# EAGLE board half bridge (EAGLE 5.08)
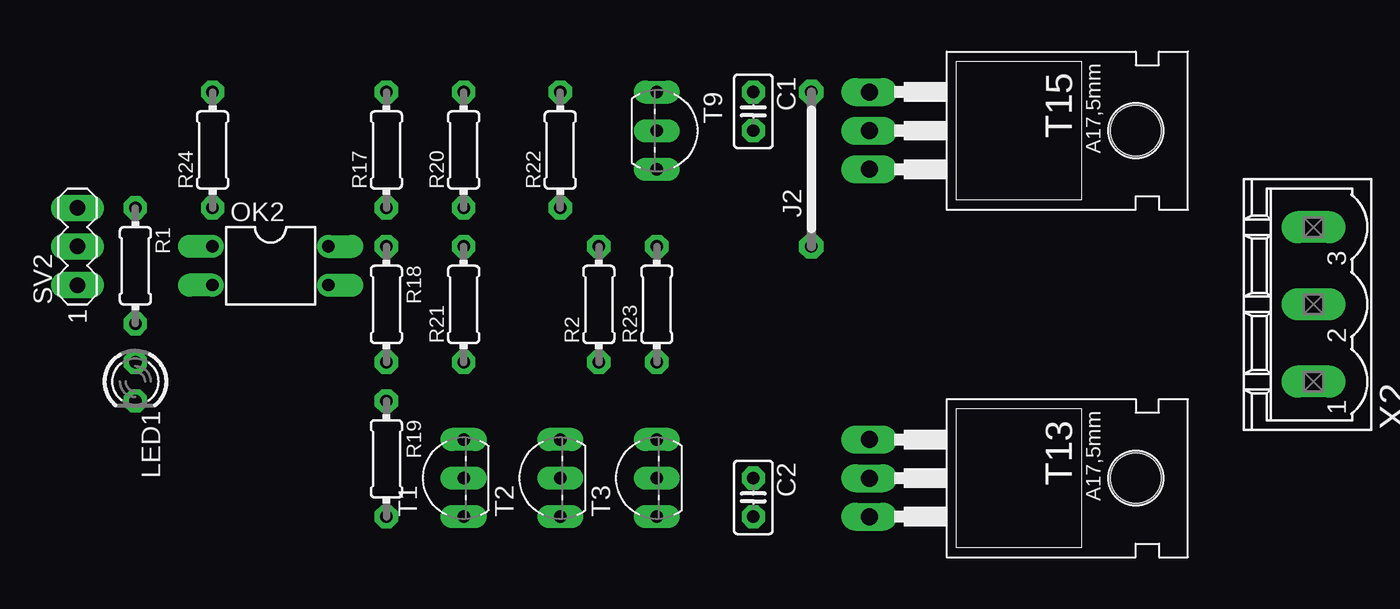
[diagram p0: board, top side]
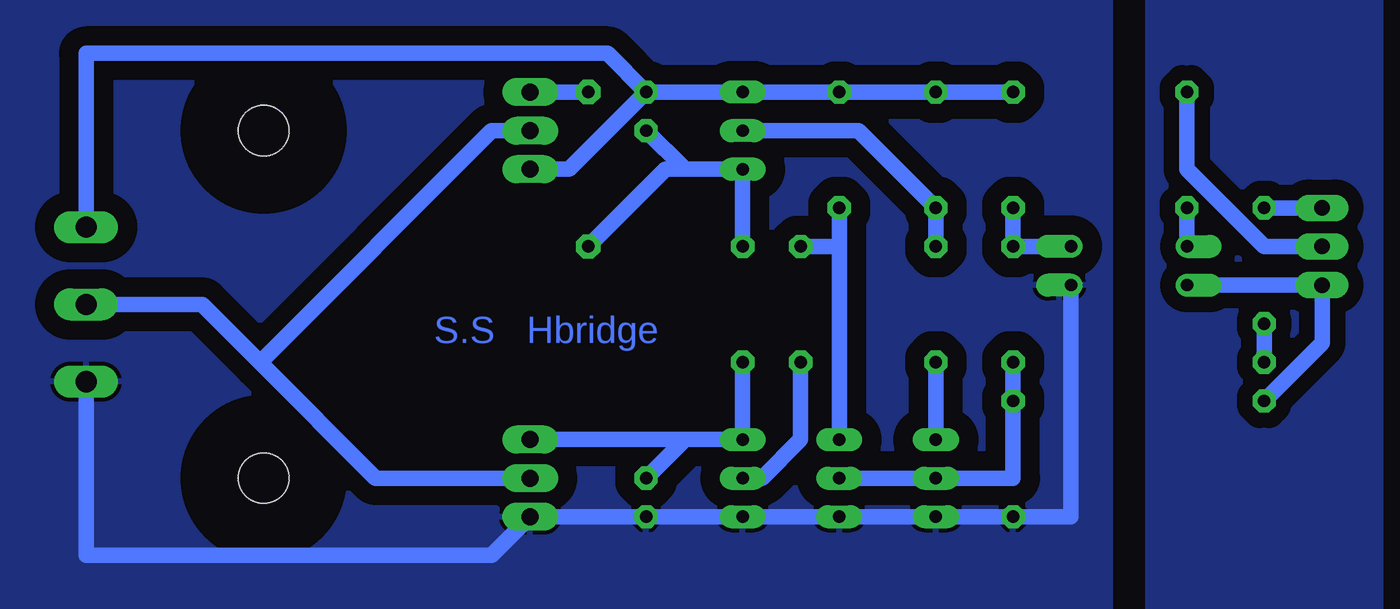
[diagram p1: board, bottom side, seen from below]

No outline drawn. Coordinates in mm, seen from the top.
Copper layers (1*16): Top 0.035mm / dielectric 1.5mm / Bottom 0.035mm
Design rules "default *": minimum track width 40mil, minimum drill 24mil, track to track 16mil, track to pad 16mil, pad to pad 10mil, via to via 10mil, smd to smd 0mil, copper to edge 40mil, drill to drill 8mil, minimum pad ring 14mil, minimum via ring 10mil, stop-mask expansion 4mil, vias tented up to drill 0mil, thermal gap 10mil

## Footprints (pad centres in the part's own frame; a part is rotated, then mirrored left to right if it is on the bottom)
C025-025X050 = drill 0.813 octagon: 1 -1.27,0; 2 1.27,0
10 = drill 0.813 pad 1.6 octagon: 1 -5.08,0; 2 5.08,0
LED3MM = drill 0.813 octagon: A -1.27,0; K 1.27,0
DIL04 = drill 0.813 offset: 1 -1.27,-3.81; 2 1.27,-3.81; 3 1.27,3.81; 4 -1.27,3.81
0204/7 = drill 0.813 octagon: 1 -3.81,0; 2 3.81,0
MA03-1 = drill 1.016 long: 1 -2.54,0; 2 0,0; 3 2.54,0
TO92-EBC = drill 0.813 long: B 0,-1.27; C 2.54,-1.27; E -2.54,-1.27
TO220 = drill 1.118 long: 1 -2.54,-6.35; 2 0,-6.35; 3 2.54,-6.35 | hole 3.302: 0,11.176
MSTBV3 = drill 1.397 long: 1 -5.08,0; 2 0,0; 3 5.08,0

## Placement (x,y rotation side)
C1  18p  [C025-025X050]  48.26,33.02 270 top
C2  18p  [C025-025X050]  48.26,7.62 270 top
J2  J10MM  [10]  52.07,29.21 90 top
LED1  [LED3MM]  7.62,15.24 270 top
OK2  PC814  [DIL04]  16.51,22.86 270 top
R1  1k2  [0204/7]  7.62,22.86 270 top
R2  4k7  [0204/7]  38.1,20.32 90 top
R17  8k2  [0204/7]  24.13,30.48 90 top
R18  2k2  [0204/7]  24.13,20.32 270 top
R19  100k  [0204/7]  24.13,10.16 270 top
R20  2k2  [0204/7]  29.21,30.48 90 top
R21  8k2  [0204/7]  29.21,20.32 90 top
R22  4k7  [0204/7]  35.56,30.48 90 top
R23  1k  [0204/7]  41.91,20.32 90 top
R24  330  [0204/7]  12.7,30.48 90 top
SV2  [MA03-1]  3.81,24.13 90 top
T1  [TO92-EBC]  27.94,8.89 90 top
T2  [TO92-EBC]  34.29,8.89 90 top
T3  [TO92-EBC]  40.64,8.89 90 top
T9  [TO92-EBC]  43.18,31.75 270 top
T13  BDX53  [TO220]  62.23,8.89 270 top
T15  BDX54  [TO220]  62.23,31.75 270 top
X2  MSTBV3  [MSTBV3]  85.09,20.32 90 top

## Library data of the parts
C1 C2 R1 R2 R17-R24 = rcl
J2 = jumper
LED1 = led
OK2 = optocoupler
SV2 = con-lstb
T1-T3 T9 T13 T15 = transistor
X2 = con-phoenix-508

## Nets
+U: C1.1 R17.2 R20.2 R22.2 T9.E T15.3 X2.3
GND: C2.2 OK2.3 R19.2 T1.E T2.E T3.E T13.3 X2.1
N$1: OK2.1 R24.1
N$2: R24.2 SV2.2
N$3: R1.1 SV2.3
N$5: R21.1 T1.C
N$6: LED1.K OK2.2 SV2.1
N$7: OK2.4 R17.1 R18.1
N$8: R2.1 T3.B
N$9: R18.2 R19.1 T1.B T2.B
N$10: LED1.A R1.2
N$14: J2.2 T15.1
N$15: R20.1 R21.2 T9.B
N$16: R2.2 R22.1 T2.C
N$19: C1.2 J2.1 R23.2 T9.C
N$20: C2.1 R23.1 T3.C T13.1
OUT1: T13.2 T15.2 X2.2

## Tracks (layer width: path | path; a pad name or v marks a point on that pad's centre or on a via)
0V
  pour Bottom (isolate 1.016): 0,0 15.24,0 15.24,40.64 0,40.64
+U
  Bottom 1.016: R17.2 R20.2 R22.2 T9.E C1.1 | T15.3 53.34,29.21 C1.1 | X2.3 85.09,36.83 50.8,36.83 C1.1
GND
  Bottom 1.016: OK2.3 20.32,6.35 R19.2 T1.E T2.E T3.E C2.2 T13.3 58.42,3.81 85.09,3.81 X2.1
  pour Bottom (isolate 1.27): 17.78,0 91.44,0 91.44,40.64 17.78,40.64
N$1
  Bottom 1.016: OK2.1 R24.1
N$2
  Bottom 1.016: R24.2 12.7,29.21 7.62,24.13 SV2.2
N$3
  Bottom 1.016: SV2.3 R1.1
N$5
  Bottom 1.016: T1.C R21.1
N$6
  Bottom 1.016: LED1.K 3.81,17.78 SV2.1 OK2.2
N$7
  Bottom 1.016: OK2.4 R18.1 R17.1
N$8
  Bottom 1.016: T3.B 40.64,8.89 38.1,11.43 R2.1
N$9
  Bottom 1.016: R18.2 R19.1 24.13,8.89 T1.B T2.B
N$10
  Bottom 1.016: LED1.A R1.2
N$14
  Bottom 1.016: J2.2 T15.1
N$15
  Bottom 1.016: R21.2 R20.1 34.29,31.75 T9.B
N$16
  Bottom 1.016: 35.56,24.13 R22.1 | T2.C 35.56,24.13 | 35.56,24.13 R2.2
N$19
  Bottom 1.016: R23.2 T9.C 45.72,29.21 | 45.72,29.21 C1.2 | J2.1 46.99,29.21 45.72,29.21
N$20
  Bottom 1.016: R23.1 T3.C 45.72,11.43 | 45.72,11.43 C2.1 | 45.72,11.43 T13.1
OUT1
  Bottom 1.016: T13.2 66.04,8.89 73.66,16.51 | 73.66,16.51 77.47,20.32 X2.2 | T15.2 58.42,31.75 73.66,16.51

## Text on the board
Bottom: S.S Hbridge